# Altium PCB CC3501_StabilityController.PcbDoc
Units mm, origin at the board's own origin, x right, y up, seen from the top; angles counter-clockwise.
Board outline 49.91 x 95.88 mm, 2 copper layers (Top Layer, Bottom Layer); 90 components, 59 nets, 320 pads, 0 vias.
Unrouted connection lines stored in the file: 208.
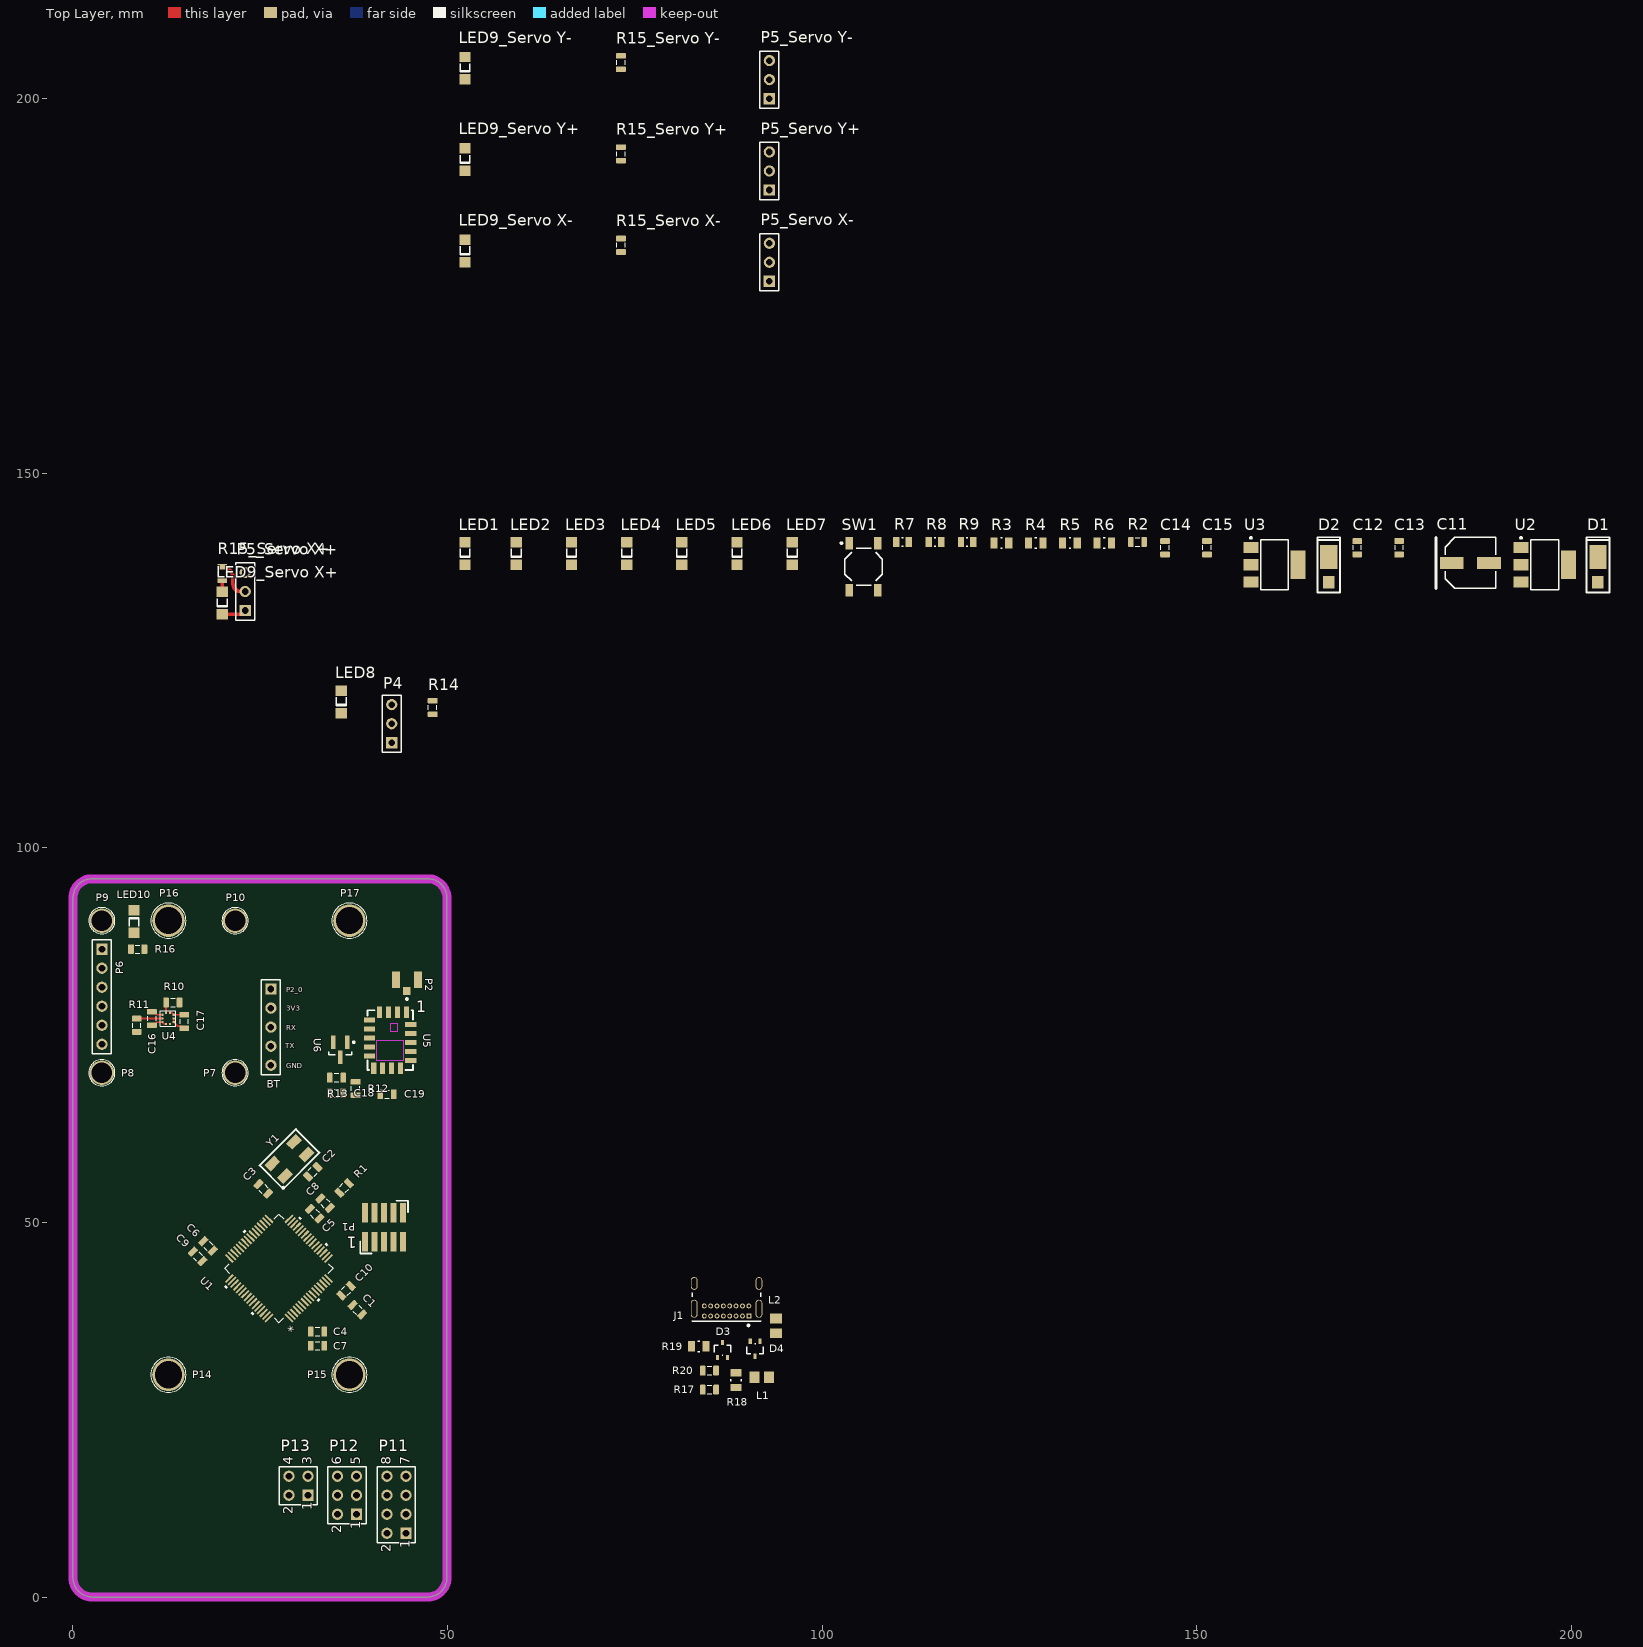
[diagram p0: Top Layer view]
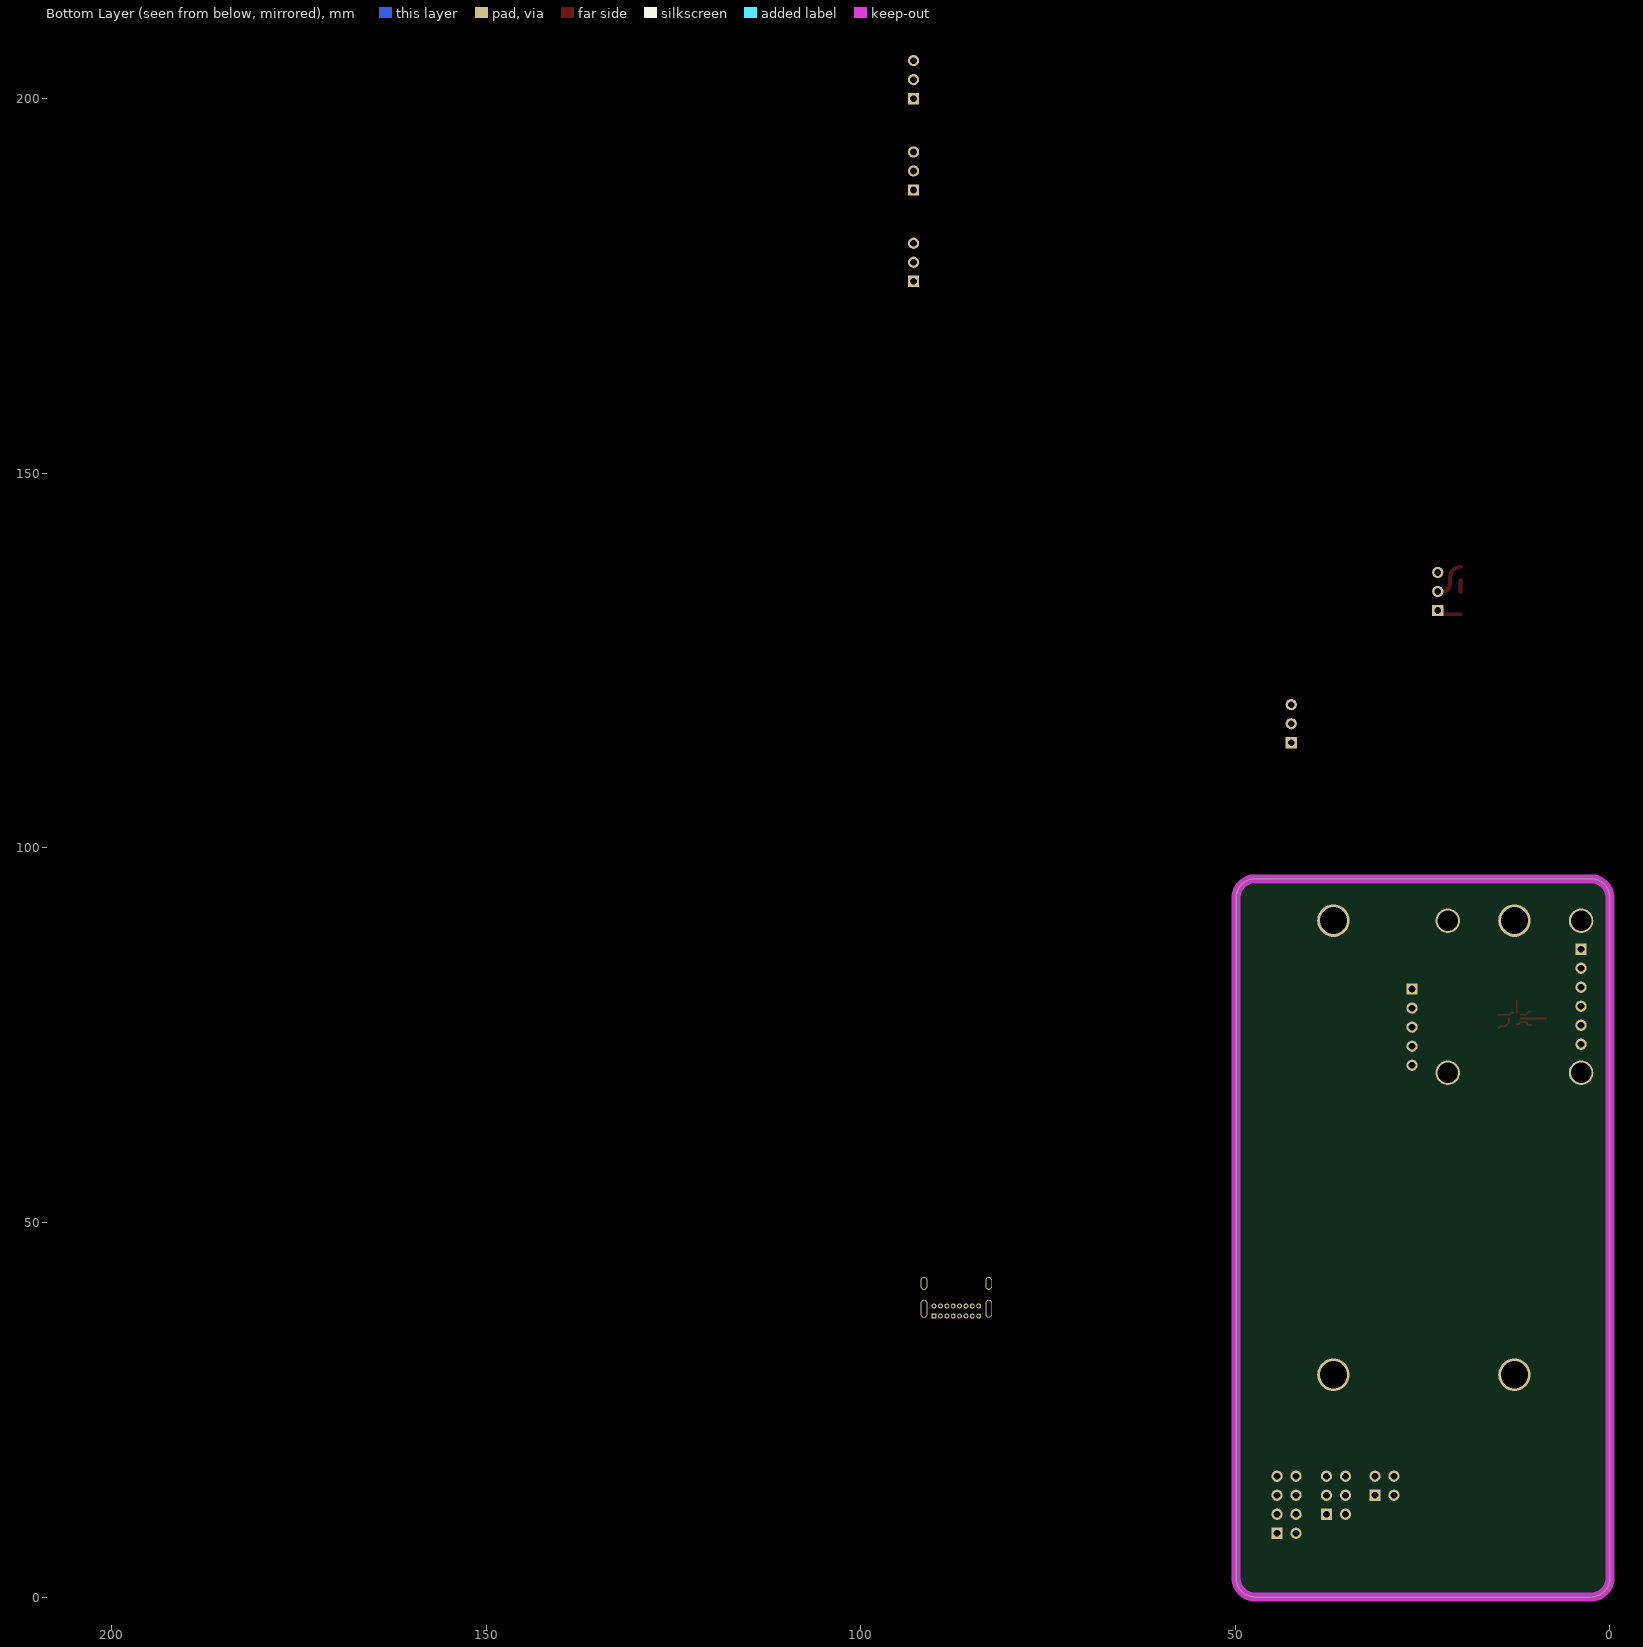
[diagram p1: Bottom Layer view, seen from below]

## Layer stack, top to bottom
Top Solder: solder mask 0.0102, Solder Resist, Dk 3.5
Top Layer: signal copper 0.0356
Dielectric 1: dielectric 0.32, FR-4, Dk 4.8
Bottom Layer: signal copper 0.0356
Bottom Solder: solder mask 0.0102, Solder Resist, Dk 3.5

## Board outline
2.54,0 cw(c2.54,2.54) 0,2.54 0,93.345 cw(c2.54,93.345) 2.54,95.885 47.371,95.885 cw(c47.371,93.345) 49.911,93.345 49.911,2.54 cw(c47.371,2.54) 47.371,0

## Design rules (kind name [scope] priority, off if disabled: settings)
Clearance [All] p1: gap=0.203 ignorepadtopadclearanceinfootprint=TRUE except(0: Arc-Hole Track-Hole SMDPad-Hole THPad-Hole Via-Hole Fill-Hole Poly-Hole Region-Hole Text-Hole; 0.254: THPad-THPad THPad-Via THPad-Fill THPad-Poly THPad-Region THPad-Text Via-Via Via-Fill Via-Poly Via-Region Via-Text; 0.5: Fill-Fill Fill-Poly Fill-Region Fill-Text Poly-Poly Poly-Region Poly-Text Region-Region Region-Text Text-Text)
PolygonConnect [All] p1: connectstyle=Relief reliefconductorwidth=0.5 reliefentries=4 polygonreliefangle="90 Angle" airgapwidth=0.5
RoomDefinition "MK22FN512VLH12 Pins" [InComponentClass('MK22FN512VLH12 Pins')] p1: confinementstyle=ConfineIn formatcopy=TRUE lockcomponents=FALSE outline -25.4,-25.4 25.4,-25.4 25.4,0 -25.4,0
RoomDefinition "MCU Power" [InComponentClass('MCU Power')] p2: confinementstyle=ConfineIn formatcopy=TRUE lockcomponents=FALSE outline -25.4,-25.4 25.4,-25.4 25.4,0 -25.4,0
RoomDefinition IMU [InComponentClass('IMU')] p3: confinementstyle=ConfineIn formatcopy=TRUE lockcomponents=FALSE outline -25.4,-25.4 25.4,-25.4 25.4,0 -25.4,0
RoomDefinition "Bluetooth Module" [InComponentClass('Bluetooth Module')] p4: confinementstyle=ConfineIn formatcopy=TRUE lockcomponents=FALSE outline -25.4,-25.4 25.4,-25.4 25.4,0 -25.4,0
RoomDefinition "Barometric Pressure Sensor" [InComponentClass('Barometric Pressure Sensor')] p5: confinementstyle=ConfineIn formatcopy=TRUE lockcomponents=FALSE outline -25.4,-25.4 25.4,-25.4 25.4,0 -25.4,0
RoomDefinition USB [InComponentClass('USB')] p6: confinementstyle=ConfineIn formatcopy=TRUE lockcomponents=FALSE outline 78.232,24.892 96.012,24.892 96.012,46.482 78.232,46.482
RoomDefinition Power [InComponentClass('Power')] p7: confinementstyle=ConfineIn formatcopy=TRUE lockcomponents=FALSE outline 51.054,133.223 205.359,133.223 205.359,144.399 51.054,144.399
RoomDefinition Master [InComponentClass('Master')] p8: confinementstyle=ConfineIn formatcopy=TRUE lockcomponents=FALSE outline 27.051,5.588 45.974,5.588 45.974,21.463 27.051,21.463
RoomDefinition "Servo X+" [InComponentClass('Servo X+')] p9: confinementstyle=ConfineIn formatcopy=TRUE lockcomponents=FALSE outline 17.272,130.175 26.416,130.175 26.416,141.097 17.272,141.097
RoomDefinition "Servo X-" [InComponentClass('Servo X-')] p10: confinementstyle=ConfineIn formatcopy=TRUE lockcomponents=FALSE outline 51.054,174.117 108.585,174.117 108.585,185.039 51.054,185.039
RoomDefinition "Servo Y+" [InComponentClass('Servo Y+')] p11: confinementstyle=ConfineIn formatcopy=TRUE lockcomponents=FALSE outline 51.054,186.309 108.585,186.309 108.585,197.231 51.054,197.231
RoomDefinition "Servo Y-" [InComponentClass('Servo Y-')] p12: confinementstyle=ConfineIn formatcopy=TRUE lockcomponents=FALSE outline 51.054,198.501 108.585,198.501 108.585,209.423 51.054,209.423
RoomDefinition "Electronic Speed Control" [InComponentClass('Electronic Speed Control')] p13: confinementstyle=ConfineIn formatcopy=TRUE lockcomponents=FALSE outline 34.544,109.209 69.596,109.209 69.596,124.587 34.544,124.587
RoutingVias [All] p1: holewidth=0.7 width=1.7 viastyle="Through Hole" minholewidth=0.7 minwidth=1.7 maxholewidth=0.7 maxwidth=2.7
SolderMaskExpansion [All] p1: expansion=0.102 istentingtop=FALSE
UnConnectedPin [All] p1:
Width [All] p1: maxlimit=1 minlimit=0.203 preferedwidth=0.5 minimp=50.000000 maximp=50.000000 favimp=50.000000
30 further rules are at their usual default settings.

## Classes and differential pairs
channel class ServoControl: "Servo X+" "Servo X-" "Servo Y+" "Servo Y-"
component class USB: D3 D4 J1 L1 L2 R17 R18 R19 R20
component class "Servo Y-": "LED9_Servo Y-" "P5_Servo Y-" "R15_Servo Y-"
component class "Servo Y+": "LED9_Servo Y+" "P5_Servo Y+" "R15_Servo Y+"
component class "Servo X-": "LED9_Servo X-" "P5_Servo X-" "R15_Servo X-"
component class "Servo X+": LED9 "LED9_Servo X+" "P5_Servo X+" "R15_Servo X+" X+
component class Power: C11 C12 C13 C14 C15 D1 D2 LED1 LED2 LED3 LED4 LED5 LED6 LED7 R2 R3 R4 R5 R6 R7 R8 R9 SW1 U2 U3
component class "MK22FN512VLH12 Pins": C1 C2 C3 P1 R1 U1 Y1
component class "MCU Power": C4 C5 C6 C7 C8 C9 C10
component class Master: P11 P12 P13 P14 P15 P16 P17
component class IMU: LED10 P6 P7 P8 P9 P10 R16
component class "Electronic Speed Control": LED8 P4 R14
component class "Bluetooth Module": BT C18 C19 P2 R12 R13 U5 U6
component class "Barometric Pressure Sensor": C16 C17 R10 R11 U4

## Components (designator, comment, footprint, x,y, rotation, side; value= is the part's Value field where it differs from the comment)
BT "Header 5" HDR1X5 26.416,81.153 r270 top (schematic designator P3)
C1 "Capacitor 2.2µF +/-20% 10V 0805" CAPC0805(2012)145_L 37.973,38.354 r315 top value=2.2µF
C2 "Capacitor 22pF +/-5% 0805" CAPC0805(2012)145_L 32.004,56.769 r225 top value=22pF
C3 "Capacitor 22pF +/-5% 0805" CAPC0805(2012)145_L 25.4,54.483 r315 top value=22pF
C4 "Capacitor 1µF +/-20% 25V 0805" CAPC0805(2012)145_L 32.639,35.433 r180 top value=1µF
C5 "Capacitor 1µF +/-20% 25V 0805" CAPC0805(2012)145_L 32.258,51.181 r135 top value=1µF
C6 "Capacitor 1µF +/-20% 25V 0805" CAPC0805(2012)145_L 18.034,46.863 r315 top value=1µF
C7 "Capacitor 100nF +/-20% 25V 0805" CAPC0805(2012)145_L 32.639,33.528 r180 top value=100nF
C8 "Capacitor 100nF +/-20% 25V 0805" CAPC0805(2012)145_L 33.655,52.578 r135 top value=100nF
C9 "Capacitor 100nF +/-20% 25V 0805" CAPC0805(2012)145_L 16.637,45.466 r315 top value=100nF
C10 "Capacitor 100nF +/-20% 25V 0805" CAPC0805(2012)145_L 36.449,40.894 r45 top value=100nF
C11 "100uF" PNSC-FP-V-D8_V 186.563,138.049 r0 top
C12 "Capacitor 1µF +/-20% 25V 0805" CAPC0805(2012)145_L 171.45,140.081 r90 top value=1µF
C13 "Capacitor 1µF +/-20% 25V 0805" CAPC0805(2012)145_L 177.038,140.081 r90 top value=1µF
C14 "Capacitor 1µF +/-20% 25V 0805" CAPC0805(2012)145_L 145.796,140.081 r90 top value=1µF
C15 "Capacitor 1µF +/-20% 25V 0805" CAPC0805(2012)145_L 151.384,140.081 r90 top value=1µF
C16 "Capacitor 100nF +/-20% 25V 0805" CAPC0805(2012)145_L 10.541,77.227 r270 top value=100nF
C17 "Capacitor 100nF +/-20% 25V 0805" CAPC0805(2012)145_L 14.859,76.846 r90 top value=100nF
C18 "Capacitor 1µF +/-20% 25V 0805" CAPC0805(2012)145_L 35.179,67.243 r0 top value=1µF
C19 "Capacitor 10µF +/-20% 25V 0805" CAPC0805(2012)145_L 41.91,67.116 r180 top value=10µF
D1 "Schottky Diode" DO-221BC 203.581,137.541 r90 top
D2 "Schottky Diode" DO-221BC 167.64,137.541 r90 top
D3 "ESDCAN06-2BWY" FP-SOT323-3L-MFG 86.708,32.966 r90 top value=15pF
D4 "ESDCAN06-2BWY" FP-SOT323-3L-MFG 91.059,33.147 r270 top value=15pF
J1 "USB4085-GF-A" FP-USB4085-GF-A-MFG 87.249,41.529 r180 top
L1 "Z0805C331BPWZT" INDC2013X105X50ML20T20 91.948,29.337 r180 top
L2 "Z0805C331BPWZT" INDC2013X105X50ML20T20 93.846,36.198 r270 top
LED1 "Blue" 1206_A 52.324,139.319 r90 top
LED2 "Red" 1206_A 59.182,139.319 r90 top
LED3 "Green" 1206_A 66.548,139.319 r90 top
LED4 "Red" 1206_A 73.914,139.319 r90 top
LED5 "Orange" 1206_A 81.28,139.319 r90 top
LED6 "Green" 1206_A 88.646,139.319 r90 top
LED7 "Green" 1206_A 96.012,139.319 r90 top
LED8 "Blue" 1206_A 35.814,119.507 r90 top
"LED9_Servo X+" "Blue" 1206_A 19.939,132.691 r90 top (schematic designator LED9)
"LED9_Servo X-" "Blue" 1206_A 52.324,179.705 r90 top (schematic designator LED9)
"LED9_Servo Y+" "Blue" 1206_A 52.324,191.897 r90 top (schematic designator LED9)
"LED9_Servo Y-" "Blue" 1206_A 52.324,204.089 r90 top (schematic designator LED9)
LED10 "Blue" 1206_A 8.128,90.17 r270 top
P1 "MHDR2X5" "JTAG 2x5 1.27mm" 41.529,49.403 r90 top
P2 "U.FL-R-SMT(01)" HRS-U.FL-R-SMT(10)_V 44.577,82.423 r90 top
P4 "Header 3" HDR1X3 42.545,114.046 r90 top
"P5_Servo X+" "Header 3" HDR1X3 22.987,131.699 r90 top (schematic designator P5)
"P5_Servo X-" "Header 3" HDR1X3 92.964,175.641 r90 top (schematic designator P5)
"P5_Servo Y+" "Header 3" HDR1X3 92.964,187.833 r90 top (schematic designator P5)
"P5_Servo Y-" "Header 3" HDR1X3 92.964,200.025 r90 top (schematic designator P5)
P6 "Header 6" HDR1X6 3.858,86.487 r270 top
P7 "M3 Mounting Hole" "M3 Mounting Hole" 21.638,69.977 r0 top
P8 "M3 Mounting Hole" "M3 Mounting Hole" 3.858,69.977 r0 top
P9 "M3 Mounting Hole" "M3 Mounting Hole" 3.858,90.297 r0 top
P10 "M3 Mounting Hole" "M3 Mounting Hole" 21.638,90.297 r0 top
P11 "Header 4X2" HDR2X4 44.45,8.509 r90 top
P12 "Header 3X2" HDR2X3 37.846,11.049 r90 top
P13 "Header 2X2" HDR2X2 31.369,13.589 r90 top
P14 "M4 Mounting Hole" "M4 Mounting Hole" 12.748,29.672 r0 top
P15 "M4 Mounting Hole" "M4 Mounting Hole" 36.909,29.672 r0 top
P16 "M4 Mounting Hole" "M4 Mounting Hole" 12.748,90.297 r0 top
P17 "M4 Mounting Hole" "M4 Mounting Hole" 36.909,90.297 r0 top
R1 "Resistor 10K +/-5% 0805 125 mW" RESC0805(2012)_L 36.196,54.611 r45 top value=10k
R2 "Resistor 10K +/-5% 0805 125 mW" RESC0805(2012)_L 142.113,140.843 r0 top value=10k
R3 "330R" FP-CRCW0805-e3-MFG 123.952,140.716 r0 top
R4 "330R" FP-CRCW0805-e3-MFG 128.524,140.716 r0 top
R5 "330R" FP-CRCW0805-e3-MFG 133.096,140.716 r0 top
R6 "330R" FP-CRCW0805-e3-MFG 137.668,140.716 r0 top
R7 "1K6" RESC2013X50X30LL20T20 110.744,140.843 r0 top
R8 "1K6" RESC2013X50X30LL20T20 115.062,140.843 r0 top
R9 "1K6" RESC2013X50X30LL20T20 119.38,140.843 r0 top
R10 "4K7" RESC0805(2012)_L 13.335,79.375 r0 top
R11 "4K7" RESC0805(2012)_L 8.509,76.327 r270 top
R12 "Resistor 4K7 +/-1% 0805 125 mW" RESC0805(2012)_L 37.719,67.878 r270 top value=4K7
R13 "1K2" RESC0805(2012)_L 35.179,69.342 r0 top
R14 "1K2" RESC0805(2012)_L 48.006,118.745 r90 top
"R15_Servo X+" "1K2" RESC0805(2012)_L 19.939,136.651 r90 top (schematic designator R15)
"R15_Servo X-" "1K2" RESC0805(2012)_L 73.152,180.467 r90 top (schematic designator R15)
"R15_Servo Y+" "1K2" RESC0805(2012)_L 73.152,192.659 r90 top (schematic designator R15)
"R15_Servo Y-" "1K2" RESC0805(2012)_L 73.152,204.851 r90 top (schematic designator R15)
R16 "1K2" RESC0805(2012)_L 8.636,86.487 r180 top
R17 "" RESC0805(2012)_L 84.963,27.686 r0 top value=33Ω
R18 "5K1" FP-CRCW0805-e3-MFG 88.519,28.956 r90 top
R19 "5K1" FP-CRCW0805-e3-MFG 83.533,33.474 r0 top
R20 "" RESC0805(2012)_L 84.963,30.226 r0 top value=33Ω
SW1 "TL3342F160QG" ESWI-TL3342F160QG_V 105.537,137.541 r0 top
U1 "MK22FN512VLH12" LQFP-64_10X10X1.6_NXP 27.495,43.863 r135 top
U2 "AP2111H-3.3TRG1" ONSC-SOT-223-4-318H-01_A_V 196.469,137.795 r0 top
U3 "AP2111H-3.3TRG1" ONSC-SOT-223-4-318H-01_A_V 160.401,137.795 r0 top
U4 "BMP384" "BMP384 LGA 2.0x2.0x0.95mm 10pin" 12.696,77.232 r0 top
U5 "BM71BLE01FC2" BM71BLE01FC2 39.335,70.328 r0 top
U6 "MCP111T-195I/TT" SOT-23-TT3_M 35.687,73.069 r270 top
Y1 "Crystal Oscillator" ABM3B 28.956,58.42 r45 top

## Footprints (in the part's own frame and the unit in brackets; to place one, negate y for a bottom-side part, rotate by r counter-clockwise, add the part's x,y. Pads: shape width x height; smd on the part's side, far side on the other; paste and mask are expansions set on the pad)
1206_A [mm] "Chip LED, 2-Leads, Body 3.2x1.6mm, IPC Medium Density"
  rect 1.4x1.5 smd: 1(-1.5,0) 2(1.5,0)
  silkscreen extent -0.5,-0.67 0.6,0.65, body extent -1.6,-0.8 1.6,0.8, height 0.68
ABM3B [mil]
  rect 71x47 smd: 1(-80,-44) 2(80,-44) 3(80,50) 4(-80,50)
  silkscreen extent -135,-85 135,90, body extent -110,-73 120,73, height 43
BM71BLE01FC2 [mm] "Microchip BM71BLE01FC2 Bluetooth Low Energy (BLE) Module"
  rect 1.5x0.7 smd: 0(5.75,4.9) 5(0.25,6.7) 6(0.25,5.5) 7(0.25,4.3) 8(0.25,3.1) 9(0.25,1.9) 14(5.75,1.3) 15(5.75,2.5) 16(5.75,3.7) 17(5.75,6.1)
  rect 0.7x1.5 smd: 1(5.2,7.75) 2(4,7.75) 3(2.8,7.75) 4(1.6,7.75) 10(0.8,0.25) 11(2,0.25) 12(3.2,0.25) 13(4.4,0.25)
  Top Layer keep-out region: 1.143,1.333 4.826,1.333 4.826,3.937 1.143,3.937
  Top Layer keep-out region: 3.048,5.207 4,5.207 4,6.223 3.048,6.223
  silkscreen extent 0,0 6.03,8
"BMP384 LGA 2.0x2.0x0.95mm 10pin" [mm] "Bosch BMP384 Barometric Pressure Sensor, 10pin, SMT"
  rect 0.27x0.285 smd: 1(0.25,0.757) 2(-0.25,0.757) 6(-0.25,-0.757) 7(0.25,-0.757)
  rect 0.285x0.27 smd: 3(-0.757,0.5) 4(-0.757,0) 5(-0.757,-0.5) 8(0.757,-0.5) 9(0.757,0) 10(0.757,0.5)
  silkscreen extent -1.02,-1.02 1.02,1.02, body extent -1.02,-1.02 1.02,1.02, height 0.95
CAPC0805(2012)145_L [mm] "Chip Capacitor, Body 2.0x1.2mm, Height 1.45mm, IPC High Density"
  rrect25% 0.76x1.3 smd: 1(-0.9,0) 2(0.89,0)
  silkscreen extent -0.3,-0.55 0.3,0.55, body extent -1,-0.6 1,0.6, height 1.45
DO-221BC [mil] "2 pin SMD for Diodes"
  rect 126x90 smd: 1(50.5,0)
  rect 66x60 smd: 2(-81.5,0)
  silkscreen extent -135,-60 155,60
ESWI-TL3342F160QG_V [mm] "SMD, 4-Leads, Body 5x5mm, Pitch 6.3mm"
  rect 1x1.7 smd: 1(-1.9,3.15) 2(-1.9,-3.15) 3(1.9,3.15) 4(1.9,-3.15)
  silkscreen extent -3.07,-2.5 2.5,3.27, body extent -2.5,-2.5 2.5,2.5, height 1.5
FP-CRCW0805-e3-MFG [mm]
  rect 0.95x1.45 smd paste+0 mask+0: 1(-0.975,0) 2(0.975,0)
  silkscreen extent -0.13,-0.7 0.13,0.7, body extent -1.55,-0.82 1.55,0.82, height 0.25
FP-SOT323-3L-MFG [mm]
  rect 0.7x0.42 smd paste+0 mask+0: 1(-1,0.65) 2(-1,-0.65) 3(1,0)
  silkscreen extent -0.67,-1.1 0.67,1.1, body extent -1.45,-1.2 1.45,1.2, height 0.25
FP-USB4085-GF-A-MFG [mm]
  rrect100% 0.9x2.4 hole 2.1 slot 0.6 at 0 deg paste-1000 mask+0: 1(-4.325,3.045) 2(4.325,3.045)
  rrect100% 0.9x1.7 hole 1.4 slot 0.6 at 0 deg paste-1000 mask+0: 3(-4.325,-0.335) 4(4.325,-0.335)
  rect 0.65x0.65 hole 0.4 paste-1000 mask+0: A1(-2.975,4.025)
  round 0.65 hole 0.4 paste-1000 mask+0: A4(-2.125,4.025) A5(-1.275,4.025) A6(-0.425,4.025) A7(0.425,4.025) A8(1.275,4.025) A9(2.125,4.025) A12(2.975,4.025) B1(2.975,2.675) B4(2.125,2.675) B5(1.275,2.675) B6(0.425,2.675) B7(-0.425,2.675) B8(-1.275,2.675) B9(-2.125,2.675) B12(-2.975,2.675)
  silkscreen extent -4.57,0.89 4.57,5.39, body extent -4.87,-4.83 4.87,4.83, height 0.25
HDR1X3 [mm] "Connector; Header; 3 Position"
  rect 1.5x1.5 hole 0.9: 1(0,0)
  round 1.5 hole 0.9: 2(2.54,0) 3(5.08,0)
  silkscreen extent -1.27,-1.27 6.35,1.27
HDR1X5 [mm] "Connector; Header; 5 Position"
  rect 1.5x1.5 hole 0.9: 1(0,0)
  round 1.5 hole 0.9: 2(2.54,0) 3(5.08,0) 4(7.62,0) 5(10.16,0)
  silkscreen extent -1.27,-1.27 11.43,1.27
HDR1X6 [mm] "Connector; Header; 6 Position"
  rect 1.5x1.5 hole 0.9: 1(0,0)
  round 1.5 hole 0.9: 2(2.54,0) 3(5.08,0) 4(7.62,0) 5(10.16,0) 6(12.7,0)
  silkscreen extent -1.27,-1.27 13.97,1.27
HDR2X2 [mm] "Connector; Header; 2x2 Position"
  rect 1.5x1.5 hole 0.9: 1(0,0)
  round 1.5 hole 0.9: 2(0,2.54) 3(2.54,0) 4(2.54,2.54)
  silkscreen extent -1.27,-1.27 3.81,3.81
HDR2X3 [mm] "Connector; Header; 3x2 Position"
  rect 1.5x1.5 hole 0.9: 1(0,0)
  round 1.5 hole 0.9: 2(0,2.54) 3(2.54,0) 4(2.54,2.54) 5(5.08,0) 6(5.08,2.54)
  silkscreen extent -1.27,-1.27 6.35,3.81
HDR2X4 [mm] "Connector; Header; 4x2 Position"
  rect 1.5x1.5 hole 0.9: 1(0,0)
  round 1.5 hole 0.9: 2(0,2.54) 3(2.54,0) 4(2.54,2.54) 5(5.08,0) 6(5.08,2.54) 7(7.62,0) 8(7.62,2.54)
  silkscreen extent -1.27,-1.27 8.89,3.81
HRS-U.FL-R-SMT(10)_V [mm] "Connector, 3-Leads, Body 2.6x2.6mm"
  rect 1.05x1 smd: 1(-1.525,0)
  rect 2.2x1.05 smd: 2(0,-1.475) 3(0,1.475)
  silkscreen extent -2.72,-0.13 -2.48,0.12, body extent -1.3,-1.3 1.3,1.3, height 1.25
INDC2013X105X50ML20T20 [mm] "Chip Inductor, 2-Leads, Body 2.2x1.45mm, IPC Low Density"
  rect 1.33x1.57 smd: 1(-0.985,0) 2(0.985,0)
  body extent -1.1,-0.72 1.1,0.72, height 1.05
"JTAG 2x5 1.27mm" [mm]
  rect 2.62x0.8 smd: 1(-1.968,2.54) 2(1.911,2.54) 3(-1.968,1.27) 4(1.911,1.27) 5(-1.968,0) 6(1.912,0) 7(-1.968,-1.27) 8(1.911,-1.27) 9(-1.968,-2.54) 10(1.911,-2.54)
  silkscreen extent -3.56,-3.17 3.49,3.17, body extent -1.97,-2.92 1.91,2.92, height 4.68
LQFP-64_10X10X1.6_NXP [mm]
  rect 1.461x0.27 smd paste+0 mask+0: 1(-5.625,3.75) 2(-5.625,3.25) 3(-5.625,2.75) 4(-5.625,2.25) 5(-5.625,1.75) 6(-5.625,1.25) 7(-5.625,0.75) 8(-5.625,0.25) 9(-5.625,-0.25) 10(-5.625,-0.75) 11(-5.625,-1.25) 12(-5.625,-1.75) 13(-5.625,-2.25) 14(-5.625,-2.75) 15(-5.625,-3.25) 16(-5.625,-3.75) 33(5.625,-3.75) 34(5.625,-3.25) 35(5.625,-2.75) 36(5.625,-2.25) 37(5.625,-1.75) 38(5.625,-1.25) 39(5.625,-0.75) 40(5.625,-0.25) 41(5.625,0.25) 42(5.625,0.75) 43(5.625,1.25) 44(5.625,1.75) 45(5.625,2.25) 46(5.625,2.75) 47(5.625,3.25) 48(5.625,3.75)
  rect 0.27x1.461 smd paste+0 mask+0: 17(-3.75,-5.625) 18(-3.25,-5.625) 19(-2.75,-5.625) 20(-2.25,-5.625) 21(-1.75,-5.625) 22(-1.25,-5.625) 23(-0.75,-5.625) 24(-0.25,-5.625) 25(0.25,-5.625) 26(0.75,-5.625) 27(1.25,-5.625) 28(1.75,-5.625) 29(2.25,-5.625) 30(2.75,-5.625) 31(3.25,-5.625) 32(3.75,-5.625) 49(3.75,5.625) 50(3.25,5.625) 51(2.75,5.625) 52(2.25,5.625) 53(1.75,5.625) 54(1.25,5.625) 55(0.75,5.625) 56(0.25,5.625) 57(-0.25,5.625) 58(-0.75,5.625) 59(-1.25,5.625) 60(-1.75,5.625) 61(-2.25,5.625) 62(-2.75,5.625) 63(-3.25,5.625) 64(-3.75,5.625)
  silkscreen extent -6.86,-6.86 6.86,6.86, body extent -6,-6 6,6, height 1.6
"M3 Mounting Hole" [mm] "ID 2.73mm"
  round 3.276 hole 2.73: 1(0,0)
  silkscreen extent -1.75,-1.75 1.75,1.75
"M4 Mounting Hole" [mm] "ID 3.62mm"
  round 4.344 hole 3.62: 1(0,0)
  silkscreen extent -2.35,-2.35 2.35,2.35
ONSC-SOT-223-4-318H-01_A_V [mm] "SOT223, 4-Leads, Body 6.7x3.7mm, Pitch 2.3mm"
  rect 2x1.5 smd: 1(-3.15,2.3) 2(-3.15,0) 3(-3.15,-2.3)
  rect 2x3.8 smd: 4(3.15,0)
  silkscreen extent -3.27,-3.35 1.85,3.72, body extent -3.65,-3.35 3.65,3.35, height 1.8
PNSC-FP-V-D8_V [mm] "CAPAE, 2-Leads, Body 6.80x6.80mm"
  rect 3.2x1.6 smd: 1(-2.5,0) 2(2.5,0)
  silkscreen extent -4.6,-3.4 3.4,3.4, body extent -3.9,-3.4 3.9,3.4, height 8
RESC0805(2012)_L [mm] "Chip Resistor, Body 2.0x1.3mm, IPC High Density"
  rrect25% 0.76x1.3 smd: 1(-0.9,0) 2(0.89,0)
  silkscreen extent -0.3,-0.55 0.3,0.55, body extent -1,-0.62 1,0.63, height 0.6
RESC2013X50X30LL20T20 [mm] "Chip Resistor, 2-Leads, Body 2.00x1.25mm, IPC High Density"
  rect 0.85x1.35 smd: 1(-0.825,0) 2(0.825,0)
  silkscreen extent -0.1,-0.58 0.1,0.58, body extent -1.1,-0.72 1.1,0.72, height 0.5
SOT-23-TT3_M [mm] "SOT23, 3-Leads, Body 2.9x1.3mm, Pitch 0.95mm, Lead Span 2.4mm, IPC Low Density"
  rect 1.8x0.6 smd: 1(-1,0.95) 2(-1,-0.95) 3(1,0)
  silkscreen extent -1.12,-1.55 0.7,1.93, body extent -0.7,-1.52 0.7,1.53, height 1.12

## Part data
BT: "Header, 5-Pin", LatestRevisionDate=17-Jul-2002, LatestRevisionNote="Re-released for DXP Platform.", Publisher="Altium Limited"
C1: library part CMP-001-00079-2, "Chip Capacitor, 2.2µF +/-20%, 10V, 0805, Thickness 1.45 mm", Case/Package=0805, Max Operating Temperature=85°C, Min Operating Temperature=-55°C, Tolerance=10%, Voltage Rating=10V, Mounting Technology=SMT, Pins=2
C2 C3: library part CMP-001-00081-2, "Chip Capacitor, 22pF +/- 5%, 0805, Thickness 1.45 mm", Case/Package=0402, Max Operating Temperature=85°C, Min Operating Temperature=-55°C, Tolerance=5%, Voltage Rating=16V, Mounting Technology=SMT, Pins=2
C4 C5 C6 C12 C13 C14 C15 C18: library part CMP-001-00079-2, "Chip Capacitor, 1µF +/-20%, 25V, 0805, Thickness 1.45 mm", Case/Package=0805, Max Operating Temperature=85°C, Min Operating Temperature=-55°C, Tolerance=10%, Voltage Rating=25V, Mounting Technology=SMT, Pins=2
C7 C8 C9 C10 C16 C17: library part CMP-001-00079-2, "Chip Capacitor, 100nF +/-20%, 25V, 0805, Thickness 1.45 mm", Case/Package=0805, Max Operating Temperature=85°C, Min Operating Temperature=-55°C, Tolerance=10%, Voltage Rating=25V, Mounting Technology=SMT, Pins=2
C11: library part CMP-2000-06217-1, "Aluminum Electrolytic Capacitor, 100 uF, +/- 20%, 25 V, 2-Pin SMD (Size Code D8), -55 to 105 degC, RoHS, Tape and Reel", AE Capacitor Case=RadialCan-SMD, Capacitance=100µF, Capacitance Tolerance=±20%, Leakage Current=25µA, Life Time @ Temperature=2000hours@105°C, Manufacturer=Panasonic, Operating Temperature Max=105°C, Operating Temperature Min=-55°C, Operating Temperature Range=-55°Cto+105°C, Package Description="2-Pin Electrolytic Aluminum Capacitor, Body 6.6 x 6.6 mm", Package Reference=PNSC-FP-V-D8, Ripple Current AC=600mA, Voltage Rating=25V, Capacitance Tolerance ±=±20%, Capacitor Case Style=RadialCan-SMD, Datasheet URL=http://industrial.panasonic.com/cdbs/www-data/pdf/RDE0000/ABA0000C1184.pdf, Datasheet Version=03/2016, Diameter=6.3mm, ESR=0.16ohm, External Length / Height=7.7mm, Height=7.7mm, Lifetime @ Temperature=2000hours@105°C, Manufacturer URL=http://www.panasonic.com/, Mounting Technology=SurfaceMount, Package URL=http://industrial.panasonic.com/cdbs/www-data/pdf/RDE0000/DME0000COL48.pdf, Packaging=CutTape, Product Range=PANASONIC-FPSeries, Series=FP, SVHC=ToBeAdvised
C19: library part CMP-001-00079-2, "Chip Capacitor, 10µF +/-20%, 25V, 0805, Thickness 1.45 mm", Case/Package=0805, Max Operating Temperature=85°C, Min Operating Temperature=-55°C, Tolerance=10%, Voltage Rating=25V, Mounting Technology=SMT, Pins=2
D1 D2: library part "Schottky 2 pin 8A", "Small Signal Schottky Diode, Single, 45 V, 8 A, 570 mV", Manufacturer P/N=V8PAL45-M3/I, Supplier Part Number 1=2425092, DatasheetURL=http://www.farnell.com/datasheets/2049270.pdf, Supplier 1=Element14
D3 D4: library part CMP-12225-000055-1, "TVS DIODE 35V 59V SOT323-3", Breakdown Voltage=38V, Capacitance=3pF, Clamping Voltage=59V, Manufacturer=STMicroelectronics, Manufacturer Part Number=ESDCAN02-2BWY, Max Junction Temp=+175°C, Package=SOT323-3L, Peak Pulse Current=3A, Peak Pulse Power=170W, Reverse Standoff Voltage=35V, Temperature="-55°C to +175°C", Temperature Range Low=-55°C, Automotive=Yes, Automotive Grade="Grade 0", Category=Diode, ComponentLink2Description=Datasheet, ComponentLink2URL=https://www.st.com/resource/en/datasheet/esdcan02-2bwy.pdf, Datasheet=https://au.mouser.com/datasheet/2/389/dm00551472-1799515.pdf, Device Class L1="Circuit Protection", Device Class L2="TVS Diodes", Device Class L3=unset, Digikey Description="TVS DIODE 26.5V 44V SOT323-3", Direction=Bidirectional, Height=1.1mm, Ipc Land Pattern Name=SOT65P210X95-3, Lead Free=Yes, Mouser Description="TVS Diodes / ESD Suppressors Automotive dual-line Transil, Transient voltage suppressor (TVS) for CAN bus", Number Of Channels=2, Octopart=https://octopart.com/esdcan02-2bwy-stmicroelectronics-58631133, RoHS=TRUE, Standoff Height=0mm, Temperature Range High=+175°C
J1: library part CMP-196119-000001-1, "CONN RCPT USB2.0 TYPEC 16POS", Current Rating=4.25A, Manufacturer="Global Connector Technology", Package=0, Temperature="-40°C to +85°C", Temperature Range High=+85°C, Temperature Range Low=-40°C, Voltage Rating=20V, Automotive=No, Category=Conn, ComponentLink2Description=Datasheet, ComponentLink2URL=https://gct.co/files/drawings/usb4085.pdf, Conn Orientation="Right Angle", Contact Material=Gold,Nickel, Device Class L1=Connectors, Device Class L2="USB Connectors", Device Class L3=unset, Digikey Description="CONN RCPT USB2.0 TYPEC 16POS", Height=3.66mm, Is Female=yes, Lead Free=Yes, Manufacturer Part Number=USB4085-GF-A, Number Of Contacts=16, Octopart=https://octopart.com/usb4085-gf-a-global+connector+technology-94773699, Pitch=0.85mm, RoHS=TRUE, Shielding=true, Usb Standard="USB 2.0"
L1 L2: library part CMP-006-00000-2, "IND, Chip Ferrite Bead, 330 Ohm, +/- 25%, 1.8 A, -40 to 125 degC, 0805 (2012 Metric), Tape and Reel", Case/Package=0805, Current Rating=1.8A, Manufacturer=KEMET, Max Operating Temperature=125°C, Min Operating Temperature=-40°C, Package Description="2-Pin Surface Mount Device, Body 2 x1.25 mm", Package Quantity=4000, Resistance=90mohm, Tolerance=25%, Core Material=Ferrite, Datasheet URL=https://au.mouser.com/datasheet/2/212/1/KEM_FB0002_Z_PWZ-2064396.pdf, Datasheet Version=Nov-11, Impedance=330Ohm, Max Current Rating=1.8A, Mounting Technology=SM, Package Reference=0805, Packaging=TapeandReel, RoHS Compliant=True
LED1 LED8 "LED9_Servo X+" "LED9_Servo X-" "LED9_Servo Y+" "LED9_Servo Y-" LED10: library part CMP-1426-00015-1, "KPT-3216LVVBC-D -  LED, 3.2mm x 1.6mm, Blue, SMD, 2 mA, 2.65 V, 470 nm", Manufacturer=Kingbright, PartNumber=KPT-3216LVVBC-D, Color=Blue, ComponentLink1Description="Manufacturer URL", ComponentLink2Description=Datasheet, ComponentLink2URL=http://www.farnell.com/datasheets/2068439.pdf, Element14 Order Code=2610425, IF=2mA, PackageReference=1206_A
LED2 LED4: library part CMP-1426-00013-1, "KPT-3216LVSECK-J3-PRV -  LED, 3.2mm x 1.6mm, Red, SMD, 2 mA, 1.8 V, 625 nm", Manufacturer=Kingbright, PartNumber=KPT-3216LVSECK-J3-PRV, ComponentLink1Description="Manufacturer URL", ComponentLink2Description=Datasheet, ComponentLink2URL=http://www.farnell.com/datasheets/2068435.pdf, Element14 Order Code=2610421, IF=2mA, PackageReference=1206_A
LED3 LED6 LED7: library part CMP-1426-00014-1, "KPT-3216LVZGCK -  LED, 3.2mm x 1.6mm, Green, SMD, 2 mA, 2.65 V, 525 nm", Manufacturer=Kingbright, PartNumber=KPT-3216LVZGCK, Color=Green, ComponentLink1Description="Manufacturer URL", ComponentLink2Description=Datasheet, ComponentLink2URL=http://www.farnell.com/datasheets/2068438.pdf, Element14 Order Code=2610424, IF=2mA, PackageReference=1206_A
LED5: library part CMP-1426-00019-1, "APT3216LSECK/J4-PRV -  LED, 3.2mm x 1.6mm, Orange, SMD, 2 mA, 1.8 V, 590 nm", Color=Yellow, Manufacturer=Kingbright, PartNumber=KPT-3216LVSYCK-J3-PRV, ComponentLink1Description="Manufacturer URL", ComponentLink2Description=Datasheet, ComponentLink2URL=http://www.farnell.com/datasheets/2068437.pdf, Element14 Order Code=2610423, IF=2mA, PackageReference=1206_A
P1: "Header, 5-Pin, Dual row", LatestRevisionDate=17-Jul-2002, LatestRevisionNote="Re-released for DXP Platform.", Publisher="Altium Limited"
P2: library part CMP-2000-05151-1, "CONN RECPT ULTRA-MINI COAX SMD", Centre Contact Resistance=25mohm, Contact Resistance=10mohm, Flammability Rating=UL94V-0, Frequency Max=6GHz, Insulation Resistance=500Mohm, Manufacturer="Hirose Electric", Operating Temperature Max=90degC, Operating Temperature Min=-40degC, Package Description="3-Pin Surface Mount Device, Body 2.6 x 2.6 mm", Package Reference=U.FL-R-SMT(10), Voltage Rating V AC=60V, Approval Category=UL94V-0, Body Plating=Silver, Body Style=StraightJack, Coaxial Termination=Solder, Connector Mounting=PCB, Connector Mounting Orientation=PCBoard, Connector Type=UFLCoaxial, Contact Material=PhosphorBronze, Contact Plating=Gold, Datasheet URL=http://www.farnell.com/datasheets/91524.pdf, Datasheet Version=Feb-04, External Length / Height=2.5mm, Female Contact Material=PhosphorBronze, Female Contact Plating=Gold, Impedance=50ohm, Jacket Material=LCP, Male Contact Material=Brass, Male Contact Plating=Gold, Manufacturer URL=https://www.hirose.com, Material=PhosphorBronze, Mounting Type=PCBoard, Operating Frequency Max=6GHz, Outer Contact Resistance=10mohm, Secondary Insulation Material=PBT, SVHC=NoSVHC(18-Jun-2012), Termination Method=Solder, VSWR=1.3
P4 "P5_Servo X+" "P5_Servo X-" "P5_Servo Y+" "P5_Servo Y-": "Header, 3-Pin", LatestRevisionDate=17-Jul-2002, LatestRevisionNote="Re-released for DXP Platform.", Publisher="Altium Limited"
P6: "Header, 6-Pin", LatestRevisionDate=17-Jul-2002, LatestRevisionNote="Re-released for DXP Platform.", Publisher="Altium Limited"
P7 P8 P9 P10: "M3 Mounting Hole, ID 2.73mm"
P11: "Header, 4-Pin, Dual row", LatestRevisionDate=17-Jul-2002, LatestRevisionNote="Re-released for DXP Platform.", Publisher="Altium Limited"
P12: "Header, 3-Pin, Dual row", LatestRevisionDate=17-Jul-2002, LatestRevisionNote="Re-released for DXP Platform.", Publisher="Altium Limited"
P13: "Header, 2-Pin, Dual row", LatestRevisionDate=17-Jul-2002, LatestRevisionNote="Re-released for DXP Platform.", Publisher="Altium Limited"
P14 P15 P16 P17: "M4 Mounting Hole, ID 3.62mm"
R1 R2: library part CMP-009-00118-2, "Chip Resistor, 10 kOhms, +/-5%, 125 mW, -55 to 155 degC, 0805", Case/Package=0805, Max Operating Temperature=155°C, Min Operating Temperature=-55°C, Power=125mW, Tolerance=5%, Pins=2
R3 R4 R5 R6: library part CMP-2001-03823-2, "RES Thick Film, 330Ω, 1%, 0.125W, 100ppm/°C, 0805", Case Code (Imperial)=0805, Case Code (Metric)=2012, Max Operating Temperature=155°C, Max Power Dissipation=125mW, Min Operating Temperature=-55°C, Package Quantity=10, Temperature Coefficient=100ppm/°C, Tolerance=1%, Voltage Rating=150V, Case/Package=0805, Composition="Thick Film", Contact Plating=Tin, Depth=1.25mm, Features="Automotive AEC-Q200", Height=0.02inch, Lead Free="Lead Free", Length=2mm, Military Standard=Not, Mount="Surface Mount", Number of Terminations=2, Packaging="Tape and Reel", Power Rating=125mW, Resistance=330R, Termination=SMD/SMT, Voltage Rating (DC)=150V, Weight=0.000194oz, Width=0.049inch
R7 R8 R9: library part CMP-1013-00531-2, Manufacturer="Vishay Dale", Part Number=CRCW08051K60FKEA
R10 R11: library part CMP-009-00076-1, "4K7 0.125W 5% 0805 (2012 Metric)  SMD", Case/Package=0805, Power=0.125W, Tolerance=5%, Mounting Technology=SMT, Pins=2
R12: library part CMP-009-00118-2, "Chip Resistor, 4.7kOhms, +/-1%, 125 mW, -55 to 155 degC, 0805", Case/Package=0805, Max Operating Temperature=155°C, Min Operating Temperature=-55°C, Power=125mW, Tolerance=1%, Pins=2
R13 R14 "R15_Servo X+" "R15_Servo X-" "R15_Servo Y+" "R15_Servo Y-" R16: library part CMP-009-00076-1, "1K2 0.125W 5% 0805 (2012 Metric)  SMD", Case/Package=0805, Power=0.125W, Tolerance=5%, Mounting Technology=SMT, Pins=2
R17 R20: library part CMP-009-00106-1, "33R 0.125W 5% 0805 (2012 Metric)  SMD", Case/Package=0805, Power=0.125W, Tolerance=5%, Mounting Technology=SMT, Pins=2
R18 R19: library part CMP-2001-03823-2, "RES Thick Film, 5K1Ω, 1%, 0.125W, 100ppm/°C, 0805", Case Code (Imperial)=0805, Case Code (Metric)=2012, Max Operating Temperature=155°C, Max Power Dissipation=125mW, Min Operating Temperature=-55°C, Package Quantity=10, Temperature Coefficient=100ppm/°C, Tolerance=1%, Voltage Rating=150V, Case/Package=0805, Composition="Thick Film", Contact Plating=Tin, Depth=1.25mm, Features="Automotive AEC-Q200", Height=0.02inch, Lead Free="Lead Free", Length=2mm, Military Standard=Not, Mount="Surface Mount", Number of Terminations=2, Packaging="Tape and Reel", Power Rating=125mW, Resistance=5K1, Termination=SMD/SMT, Voltage Rating (DC)=150V, Weight=0.000194oz, Width=0.049inch
SW1: library part CMP-011-00008-1, "Tactile Switch, SPST-NO, 50 mA, 12 V, 4-Pin SMD, RoHS, Tape and Reel", Current Rating=50mA, Manufacturer=E-Switch, Max Voltage Rating (DC)=12V, Operating Force=1.6N, Package Description="4-Pin Surface Mount Device, Body 5 x 5 mm, Pitch 6.3 mm", Package Quantity=3000, Case/Package=TL3342F160QG, Contact Material=Silver, Contact Plating=Silver, Datasheet URL=http://spec_sheets.e-switch.com/specs/P010632.pdf, Datasheet Version="Rev. I, 12/2010", Manufacturer URL=http://www.e-switch.ch/en/, Mounting Technology=SM, Package Reference=TL3342F160QG, Packaging=TapeandReel, RoHS Compliant=True, Throw Configuration=SPST, Voltage Rating (DC)=12V
U1: "No Description Available", Max_Frequency=120, Package=LQFP, Copyright="Copyright (C) 2016 Accelerated Designs. All rights reserved", CPU="ARM Cortex-M4F", Flash_KB=512, Manufacturer_Part_Number=MK22FN512VLH12, Pin_Count=64, RefDes=RefDes, SourceLibrary=NXP_2015-03-30, SRAM_KB=128, Type=DEV, Vendor=NXP
U2 U3: library part CMP-019-00030-2, "Low-Dropout Positive Fixed Voltage Regulator, 1 A, 3.3 V Output Voltage, 0 to 125 degC, 4-Pin SOT-223 (318H-01), Pb-Free, Tape and Reel", Case/Package=SOT-223-4, Dropout Voltage=1.1V, Manufacturer="ON Semiconductor", Max Input Voltage=20V, Max Operating Temperature=125°C, Max Ouput Current=1A, Max Supply Voltage=15V, Min Input Voltage=3.5V, Min Operating Temperature=0°C, Min Supply Voltage=4.75V, Nominal Output Voltage=3.3V, Package Description="4-Pin Small Outline Transistor, Body 6.5 x 3.5 mm, Pitch 2.3 mm", Package Quantity=4000, Package Reference=SOT-223-4-318H-01_A, Datasheet URL=http://www.onsemi.com/pub_link/Collateral/NCP1117-D.PDF, Datasheet Version="Rev. 27, 09/2014", Manufacturer URL=http://www.onsemi.com/, Mounting Technology=SM, Output Current=1A, Output Voltage=3.3V, Outputs=1, Packaging=TapeandReel, Pins=3, RoHS Compliant=True
U4: library part "BMP384 Barometric Pressure Sensor", "Bosch BMP384 Barometric Pressure Sensor"
U5: "Microchip BM71BLE01FC2 Bluetooth Low Energy (BLE) Module", Datasheet=https://au.mouser.com/datasheet/2/268/Bluetooth_Low_Energy_BLE_Module_DS60001372K-2257931.pdf
U6: library part CMP-0130-00051-1, "1.75Î¼A Micropower Voltage Detector, Open-Drain Output, 1.90V, 3-Pin SOT-23, Industrial Temperature, Tape and Reel", Code_IPC=SOT23-3, DatasheetVersion="revD, Jun-2005", PackageDescription="3-Lead Plastic Small Outline Transistor (TT) [SOT-23]", PackageReference=SOT-23-TT3, PackageVersion="revBB, Aug-2009"
Y1: "Abracon  ABM3B Oscillator"

## Nets (pads, with @x,y where several pads share a name; then routed paths per layer and width w, separated by ;. In a path a pad name is that pad's centre, name@x,y a point inside that pad or via, vN(x,y) a via of type N, cw(c..) or ccw(c..) an arc to the next point about the centre after c; other vN are vias at no path point)
3V3: BT.2 C4.2 C5.2 C6.2 C7.2 C8.2 C9.2 C13.2 C16.2 C17.2 C19.2 P1.1 P13.2 R1.2 R2.2 R5.2 R10.2 R11.2 R12.2 U1.3 U1.13 U1.14 U1.30 U1.48 U2.2 U4.1 U4.5 U4.6 U4.10 U5.10 U5.11 U6.3 | length 4.2
  Top Layer w0.254: C16.2 10.811,76.337 11.206,76.732 U4.5 11.946,76.732 12.188,76.49 12.438,76.49 12.446,76.482 U4.6 U4.6@12.454,76.482 ; U4.1 12.946,77.997 12.954,78.005 13.173,78.005 13.446,77.732 U4.10 ; U4.10@13.445,77.723 U4.10 ; C17.2 14.857,77.734 13.456,77.734 U4.10
3V3_USER: C15.2 P12.2 P12.4 P13.4 R6.2 U3.2
5V: "P5_Servo X+.2" "P5_Servo X-.2" "P5_Servo Y+.2" "P5_Servo Y-.2" "R15_Servo X+.2" "R15_Servo X-.2" "R15_Servo Y+.2" "R15_Servo Y-.2" C11.1 C12.2 C14.2 D1.1 D2.1 P6.1 P12.1 P12.3 P13.1 R8.2 R9.2 R16.2 U1.8 U2.3 U3.3 | length 5.3
  Top Layer w0.5: 19.939,137.541 cw(c19.939,136.144) 21.336,136.144 21.336,136.124 ccw(c21.836,136.126) 21.337,136.094 cw(c20.494,136.036) 21.339,136.036 21.339,135.466 cw(c20.494,135.466) 21.337,135.408 ccw(c21.836,135.376) 21.336,135.378 21.336,135.338 ccw(c21.836,135.34) 21.343,135.259 cw(c20.689,134.891) 21.438,134.931 ccw(c21.937,134.96) 21.526,134.675 ccw(c22.362,135.259) 22.362,134.239 22.987,134.239
5V_OUT: D2.2 L1.1
BT_IN: BT.3 U1.40 U5.5
BT_OUT: BT.4 U1.39 U5.4
CC1: J1.A5 R18.2
CC2: J1.B5 R19.2
DM: R20.1 U1.6
DM_C: D3.1 J1.A7 J1.B7 R20.2
DP: R17.1 U1.5
DP_C: D3.2 J1.A6 J1.B6 R17.2
ESC: P4.3 U1.50
ESC_5V: D1.2 P4.2 R14.2
EXTAL0: C2.2 U1.32 Y1.3
GPIO1: P11.5 U1.44
GPIO2: P11.7 U1.45
Ground: "LED9_Servo X+.1" "LED9_Servo X-.1" "LED9_Servo Y+.1" "LED9_Servo Y-.1" "P5_Servo X+.1" "P5_Servo X-.1" "P5_Servo Y+.1" "P5_Servo Y-.1" BT.5 C1.1 C2.1 C3.1 C4.1 C5.1 C6.1 C7.1 C8.1 C9.1 C10.1 C11.2 C12.1 C13.1 C14.1 C15.1 C16.1 C17.1 C18.1 C19.1 D3.3 D4.3 J1.A1 J1.A12 J1.B1 J1.B12 L2.2 LED1.1 LED2.1 LED3.1 LED4.1 LED5.1 LED6.1 LED7.1 LED8.1 LED10.1 P1.3 P1.5 P1.9 P2.2 P2.3 P4.1 P6.3 P11.6 P11.8 P12.5 P12.6 P13.3 P14.1 P15.1 P16.1 P17.1 R18.1 R19.1 SW1.3 SW1.4 U1.4 U1.15 U1.16 U1.31 U1.47 U2.1 U2.4 U3.1 U3.4 U4.3 U4.8 U4.9 U5.12 U5.17 U6.2 Y1.2 Y1.4 | length 7.1
  Top Layer w0.254: C16.1 10.811,78.127 11.207,77.732 U4.3 ; U4.9 U4.8 13.461,76.732 13.994,76.199 14.606,76.199 C17.1
  Top Layer w0.5: 19.939,131.191 22.479,131.191 ccw(c22.479,131.699) 22.987,131.699
IMU_INT: P6.6 U1.37
JTAG_TCLK: P1.4 U1.22
JTAG_TDI: P1.8 U1.23
JTAG_TDO: P1.6 U1.24
JTAG_TMS: P1.2 U1.25
NetC10_2: C10.2 U1.17
NetC18_2: C18.2 R12.1 R13.2 U5.7 U6.1
NetLED1_2: LED1.2 R3.1
NetLED2_2: LED2.2 R7.1
NetLED3_2: LED3.2 R4.1
NetLED4_2: LED4.2 R8.1
NetLED5_2: LED5.2 R9.1
NetLED6_2: LED6.2 R5.1
NetLED7_2: LED7.2 R6.1
NetLED8_2: LED8.2 R14.1
"NetLED9_Servo X+_2": "LED9_Servo X+.2" "R15_Servo X+.1" | length 1.6
  Top Layer w0.5: 19.939,134.191 19.939,135.751
"NetLED9_Servo X-_2": "LED9_Servo X-.2" "R15_Servo X-.1"
"NetLED9_Servo Y+_2": "LED9_Servo Y+.2" "R15_Servo Y+.1"
"NetLED9_Servo Y-_2": "LED9_Servo Y-.2" "R15_Servo Y-.1"
NetLED10_2: LED10.2 R16.1
NetP2_1: P2.1 U5.1
NMI: R1.1 U1.26
P2_0: BT.1 U5.16
"PWM_IN_Servo X+": "P5_Servo X+.3" U1.61
"PWM_IN_Servo X-": "P5_Servo X-.3" U1.62
"PWM_IN_Servo Y+": "P5_Servo Y+.3" U1.63
"PWM_IN_Servo Y-": "P5_Servo Y-.3" U1.64
RESET: P1.10 R2.1 R13.1 SW1.1 SW1.2 U1.34
RX1: P11.1 U1.2
RX2: P11.2 U1.59
SCL: P6.4 R10.1 U1.35 U4.2 | length 1.7
  Top Layer w0.254: R10.1@12.435,79.645 R10.1 12.435,78.008 12.446,77.997 U4.2
SDA: P6.5 R11.1 U1.36 U4.4 | length 3.4
  Top Layer w0.254: R11.1@8.504,77.232 R11.1 8.511,77.229 11.936,77.229 U4.4
Shield: J1.1 J1.2 J1.3 J1.4 L2.1
SLED1: R3.2 U1.49
SLED2: R7.2 U1.46
SLED3: R4.2 U1.51
TX1: P11.3 U1.1
TX2: P11.4 U1.60
VBUS: D4.2 J1.A4 J1.A9 J1.B4 J1.B9 L1.2
VOUT33: C1.2 U1.7
XTAL0: C3.2 U1.33 Y1.1
pads on no net: D4.1 J1.A8 J1.B8 P1.7 P6.2 P7.1 P8.1 P9.1 P10.1 U1.9 U1.10 U1.11 U1.12 U1.18 U1.19 U1.20 U1.21 U1.27 U1.28 U1.29 U1.38 U1.41 U1.42 U1.43 U1.52 U1.53 U1.54 U1.55 U1.56 U1.57 U1.58 U4.7 U5.0 U5.2 U5.3 U5.6 U5.8 U5.9 U5.13 U5.14 U5.15

## Keep-outs
Keep-Out Layer:
  the board outline again, w1.2

## Silkscreen, mask and mechanical layers (free items; w line width, h text height)
Top Overlay:
  text "P2_0" at 28.448,80.762 h0.7
  text "3V3" at 28.448,78.232 h0.7
  text "RX" at 28.448,75.692 h0.7
  text "TX" at 28.321,73.279 h0.7
  text "GND" at 28.448,70.612 h0.7

## Text inside footprints (layer, text, board x,y; h text height)
P1: Top Overlay "1" at 37.863,48.071 h1.52 r180
P11: Top Overlay "8" at 42.418,17.653 h1.27 r90; Top Overlay "7" at 44.958,17.653 h1.27 r90; Top Overlay "1" at 44.958,6.477 h1.27 r90; Top Overlay "2" at 42.418,5.969 h1.27 r90
P12: Top Overlay "1" at 38.354,9.017 h1.27 r90; Top Overlay "2" at 35.814,8.509 h1.27 r90; Top Overlay "5" at 38.354,17.653 h1.27 r90; Top Overlay "6" at 35.814,17.653 h1.27 r90
P13: Top Overlay "3" at 31.877,17.653 h1.27 r90; Top Overlay "4" at 29.337,17.653 h1.27 r90; Top Overlay "2" at 29.337,11.049 h1.27 r90; Top Overlay "1" at 31.877,11.557 h1.27 r90
U1: Top Overlay "*" at 30.014,36.047 h1.27 r135; Top Assembly "*" at 28.607,37.993 h1.27 r135
U5: Top Overlay "1" at 45.847,78.038 h1.52